# Altium PCB driver_control_2.PcbDoc
Units mm, origin at the board's own origin, x right, y up, seen from the top; angles counter-clockwise.
Board outline 75 x 80 mm, 2 copper layers (Top Layer, Bottom Layer); 60 components, 54 nets, 277 pads, 70 vias.
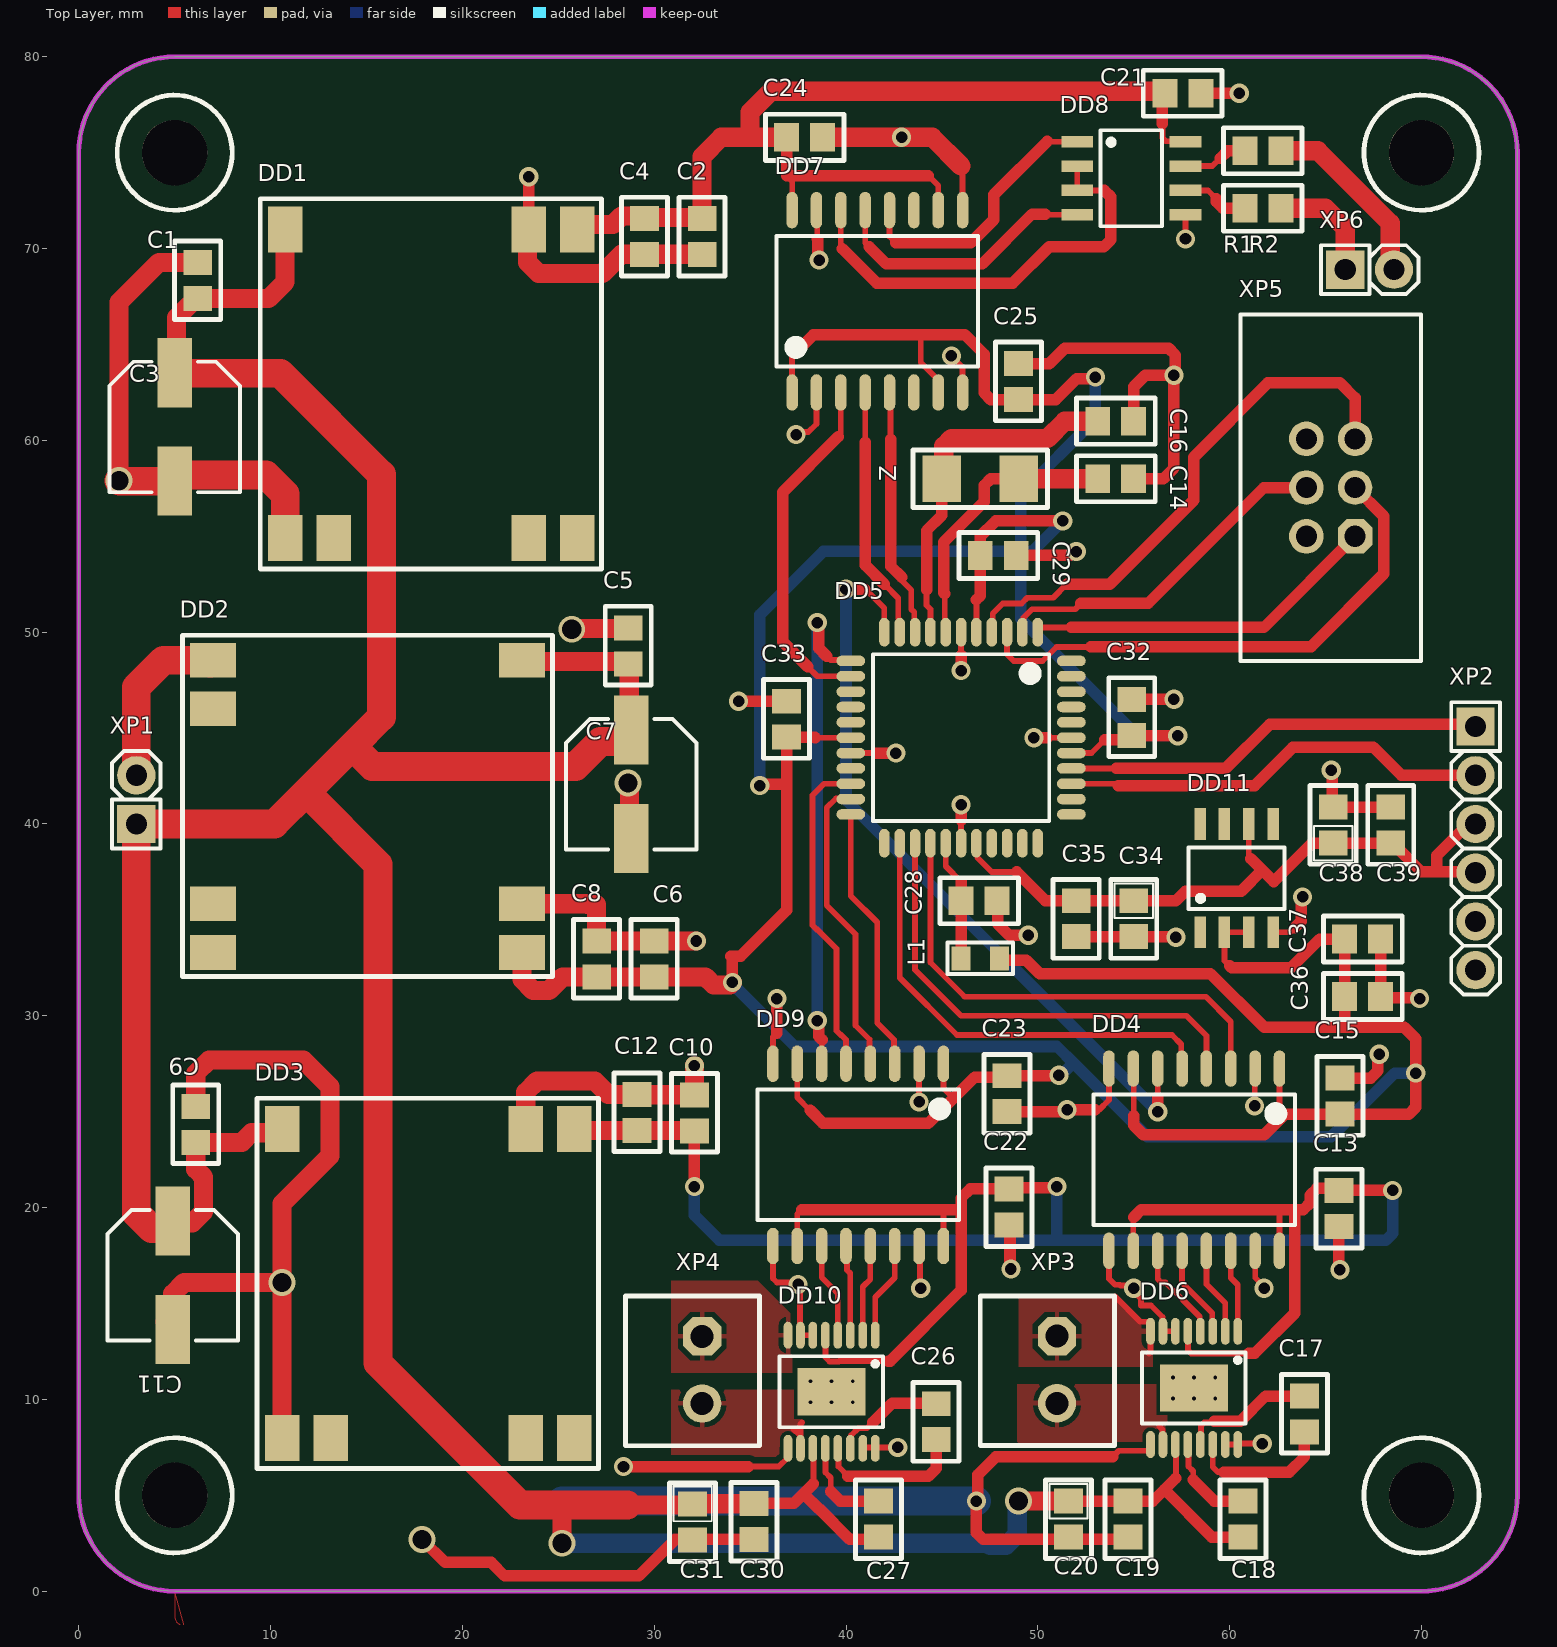
[diagram p0: Top Layer view]
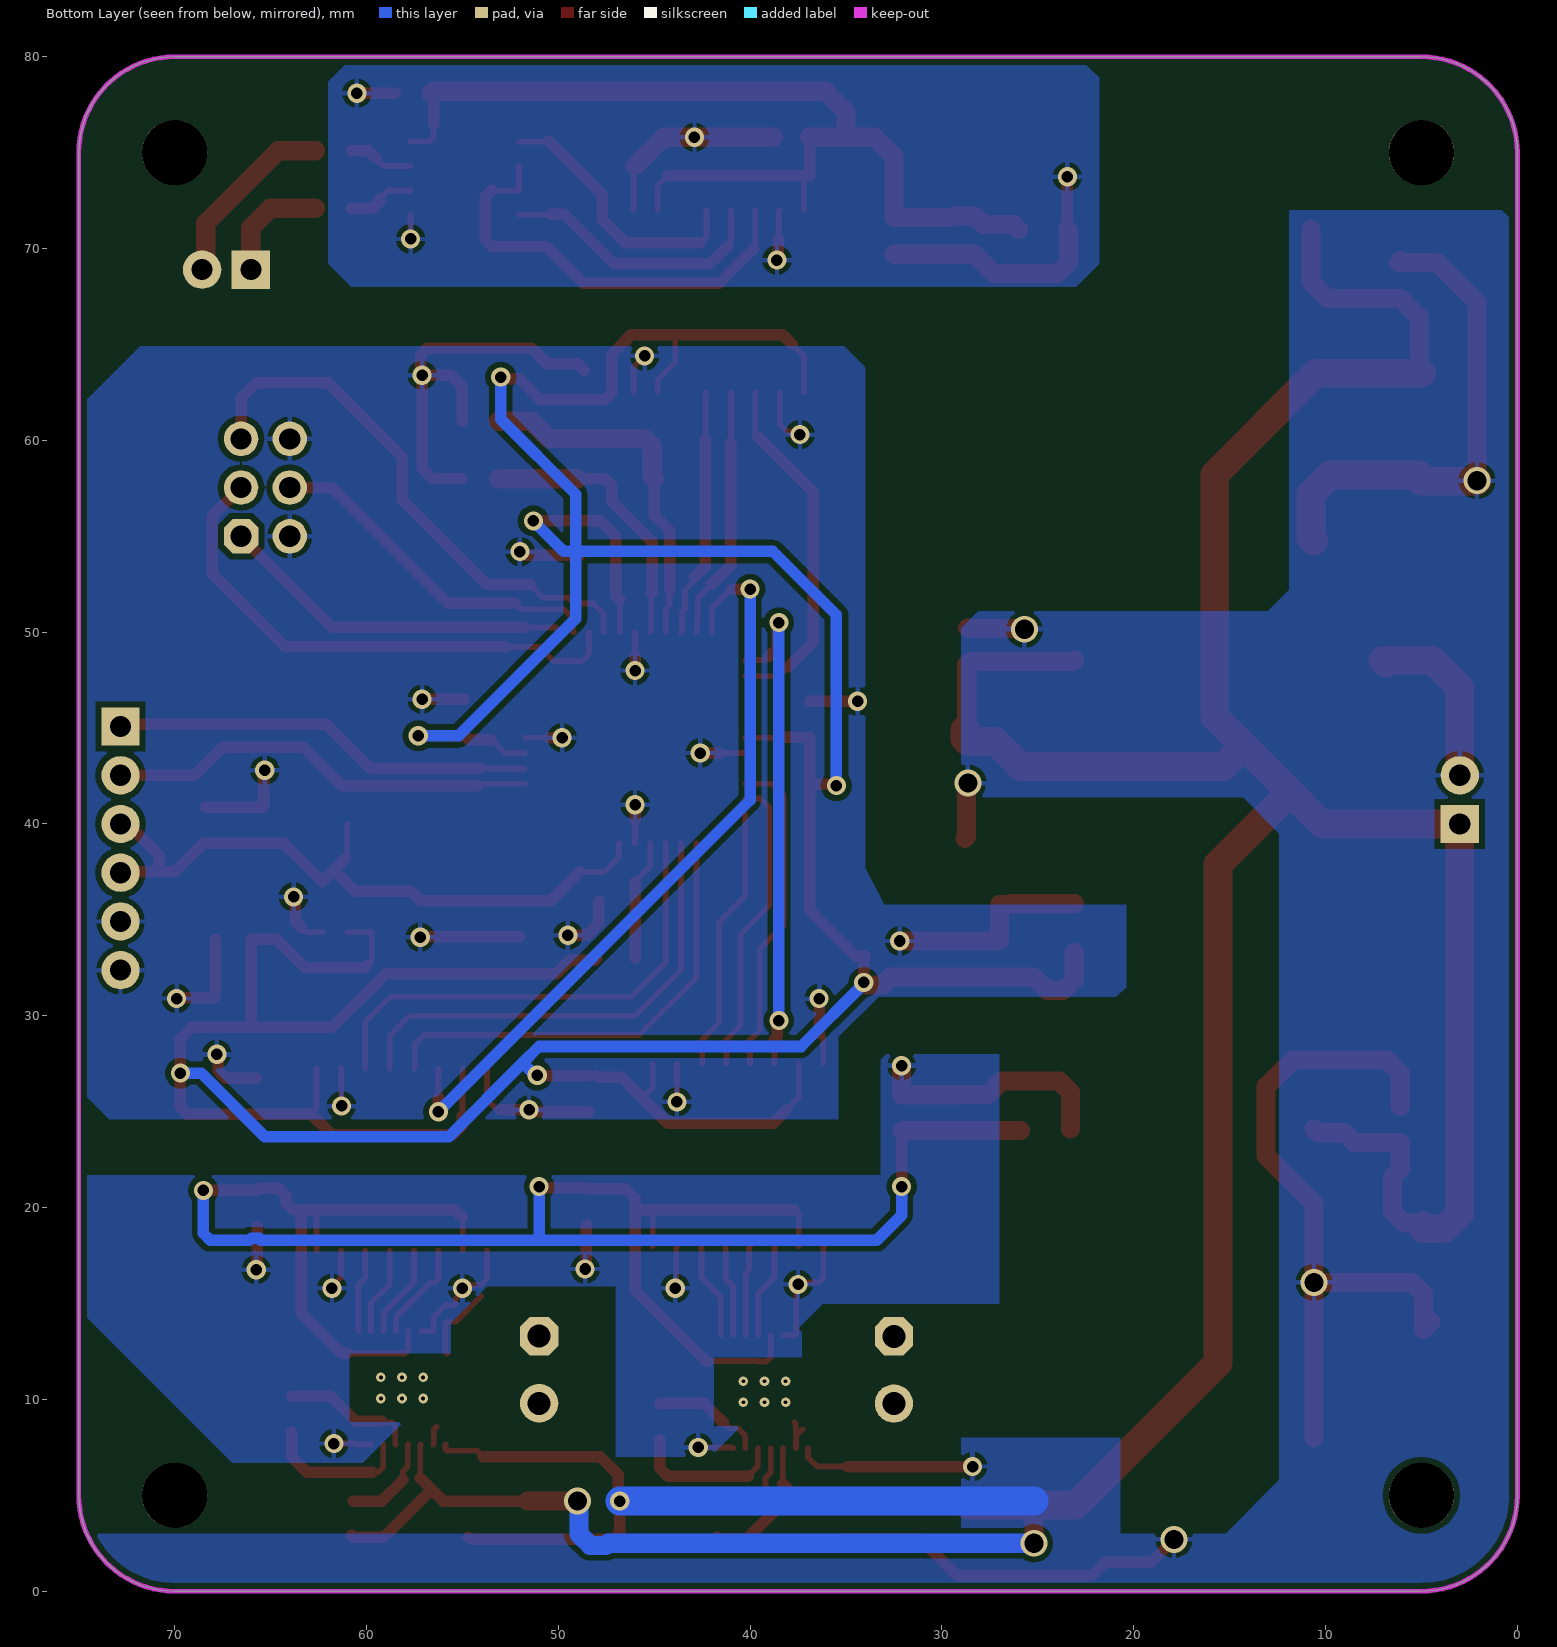
[diagram p1: Bottom Layer view, seen from below]

## Layer stack, top to bottom
Top Solder: solder mask 0.0102, Solder Resist, Dk 3.5
Top Layer: signal copper 0.0356
Dielectric 1: dielectric 0.32, FR-4, Dk 4.8
Bottom Layer: signal copper 0.0356
Bottom Solder: solder mask 0.0102, Solder Resist, Dk 3.5

## Board outline
0,5 ccw(c5,5) 5,0 70,0 ccw(c70,5) 75,5 75,9 75,75 ccw(c70,75) 70,80 5,80 ccw(c5,75) 0,75

## Design rules (kind name [scope] priority, off if disabled: settings)
Clearance Clearance_2 [All] p1: gap=0.3 ignorepadtopadclearanceinfootprint=FALSE except(0.2: Arc-SMDPad Arc-THPad Track-SMDPad Track-THPad SMDPad-SMDPad SMDPad-THPad SMDPad-Via SMDPad-Fill SMDPad-Poly SMDPad-Region SMDPad-Text SMDPad-Hole)
HoleSize [All] p1: absolutevalues=TRUE maxlimit=5 minlimit=0.5 maxpercent=80.000 minpercent=20.000
HoleToHoleClearance [All] p1: gap=0.3 allowstackedmicrovias=TRUE
PolygonConnect [All] p1: connectstyle=Relief reliefconductorwidth=0.254 reliefentries=4 polygonreliefangle="90 Angle" airgapwidth=0.254
RoutingVias [All] p1: holewidth=0.6 width=1 viastyle="Through Hole" minholewidth=0.6 minwidth=1 maxholewidth=0.6 maxwidth=1
SilkToSilkClearance [All] p1: silktosilkclearance=0.2
SilkToSolderMaskClearance [IsPad] p1: minsilkscreentomaskgap=0.2 clearancetoexposedcopper=TRUE
SolderMaskExpansion [All] p1: expansion=0.102 istentingtop=FALSE
Width [All] p1: maxlimit=4 minlimit=0.2 preferedwidth=0.3
26 further rules are at their usual default settings.

## Components (designator, comment, footprint, x,y, rotation, side; value= is the part's Value field where it differs from the comment)
C1 "10мкФ" Capacitor_0805 6.2,67.4 r90 top
C2 "0.1мкФ" Capacitor_0805 32.5,71.575 r270 top
C3 "100мкФ" CAPAE7666X61M 5,60.7 r270 top
C4 "10мкФ" Capacitor_0805 29.5,71.575 r270 top
C5 "10мкФ" Capacitor_0805 28.65,48.35 r90 top
C6 "0.1мкФ" Capacitor_0805 30,32.025 r90 top
C7 "100мкФ" CAPAE7666X61M 28.8,42.075 r270 top
C8 "10мкФ" Capacitor_0805 27,32.025 r90 top
C9 "10мкФ" Capacitor_0805 6.1,23.4 r90 top
C10 "0.1мкФ" Capacitor_0805 32.1,24 r90 top
C11 "100мкФ" CAPAE7666X61M 4.9,16.475 r270 top
C12 "10мкФ" Capacitor_0805 29.1,24.025 r90 top
C13 "0.1мкФ" Capacitor_0805 65.7,20.9 r270 top
C14 "8пкФ" Capacitor_0805 53.125,58 r0 top
C15 "0.1мкФ" Capacitor_0805 65.75,24.875 r90 top
C16 "8пкФ" Capacitor_0805 53.125,61 r0 top
C17 "22пкФ" Capacitor_0805 63.9,8.3 r90 top
C18 "0.1мкФ" Capacitor_0805 60.7,4.7 r270 top
C19 "0.1мкФ" Capacitor_0805 54.7,4.7 r270 top
C20 "1мкФ" Capacitor_tant_0805 51.6,4.7 r270 top
C21 "0.1мкФ" Capacitor_0805 58.5,78.1 r180 top
C22 "0.1мкФ" Capacitor_0805 48.5,20.975 r270 top
C23 "0.1мкФ" Capacitor_0805 48.4,26.875 r270 top
C24 "0.1мкФ" Capacitor_0805 36.9,75.8 r0 top
C25 "0.1мкФ" Capacitor_0805 49,62.125 r90 top
C26 "22пкФ" Capacitor_0805 44.7,9.775 r270 top
C27 "0.1мкФ" Capacitor_0805 41.7,4.7 r270 top
C28 "0.1мкФ" Capacitor_0805 46,36 r0 top
C29 "0.1мкФ" Capacitor_0805 47,54 r0 top
C30 "0.1мкФ" Capacitor_0805 35.2,4.575 r270 top
C31 "1мкФ" Capacitor_tant_0805 32,4.55 r270 top
C32 "0.1мкФ" Capacitor_0805 54.9,44.625 r90 top
C33 "0.1мкФ" Capacitor_0805 36.9,44.525 r90 top
C34 "1мкФ" Capacitor_tant_0805 55,36 r270 top
C35 "0.1мкФ" Capacitor_0805 52,36 r270 top
C36 "10мкФ" Capacitor_0805 66,31 r0 top
C37 "0.1мкФ" Capacitor_0805 66,34 r0 top
C38 "1мкФ" Capacitor_tant_0805 65.4,39 r90 top
C39 "0.1мкФ" Capacitor_0805 68.4,39 r90 top
DD1 "TMR-1-2411SM" TMR1SM_SMD 10.76,54.9 r270 top
DD2 "TDR-2-2411SM" TMR1SM_SMD 7,48.54 r180 top
DD3 "TMR-1-2411SM" TMR1SM_SMD 10.6,8 r270 top
DD4 "ADuM1401" ADUM_SOIC 62.6,27.25 r270 top
DD5 "ATMEGA16-8UA" ATMEGA16-44A 50,50 r270 top
DD6 "DRV8874" DRV8874_TSOP127P600-8N 60.425,13.55 r270 top
DD7 "ADuM1301" ADUM_SOIC 37.19,62.5 r90 top
DD8 "ADM485" "SOIC_N8 (REF198, ADM485)" 52.05,75.57 r0 top
DD9 "ADuM1401" ADUM_SOIC 45.08,27.5 r270 top
DD10 "DRV8874" DRV8874_TSOP127P600-8N 41.525,13.35 r270 top
DD11 "REF198" "SOIC_N8 (REF198, ADM485)" 58.46,34.35 r90 top
L1 "Fixed inductor, 10мкГн, ±20%, 0805, 100mA, -55...+125°C" "IND: 0805" 47,33 r180 top value=10мкГн
R1 "120 Ом" resistor_0805 62.675,72.1 r180 top
R2 "120 Ом" resistor_0805 62.675,75.1 r180 top
XP1 "PLS-2" "CON: PLS-2" 3,41.27 r90 top
XP2 "Connector, 6pin, 2.54mm, 500VAC, 3A" "CON: PLS-6" 72.821,38.73 r270 top
XP3 "15EDGVC-3.5-02" 15EDGVC-3.5-02 51,13.3 r270 top
XP4 "15EDGVC-3.5-02" 15EDGVC-3.5-02 32.5,13.287 r270 top
XP5 "Connector, 6pin, 2.54mm, 500VAC, 3A" "CON: IDC-6MS" 65.27,57.54 r90 top
XP6 "PLS-2" "CON: PLS-2" 67.3,68.9 r0 top
Z "11.0592Мгц" Z_0503 45,58 r0 top

## Footprints (in the part's own frame and the unit in brackets; to place one, negate y for a bottom-side part, rotate by r counter-clockwise, add the part's x,y. Pads: shape width x height; smd on the part's side, far side on the other; paste and mask are expansions set on the pad)
15EDGVC-3.5-02 [mm]
  oct 2x2 hole 1.2: 1(0,0)
  round 2 hole 1.2: 2(3.5,0)
  round 0.5 on Top Overlay: 11(-2.8,2.5)
  silkscreen extent -2.1,-4 5.7,3
ADUM_SOIC [mm]
  oval 1.9x0.6 smd: 1(0,0) 2(0,-1.27) 3(0,-2.54) 4(0,-3.81) 5(0,-5.08) 6(0,-6.35) 7(0,-7.62) 8(0,-8.89) 9(9.5,-8.89) 10(9.5,-7.62) 11(9.5,-6.35) 12(9.5,-5.08) 13(9.5,-3.81) 14(9.5,-2.54) 15(9.5,-1.27) 16(9.5,0)
  silkscreen extent 1.35,-9.69 8.15,0.8
ATMEGA16-44A [mm]
  oval 1.5x0.55 smd: 1(0,0) 2(0,-0.8) 3(0,-1.6) 4(0,-2.4) 5(0,-3.2) 6(0,-4) 7(0,-4.8) 8(0,-5.6) 9(0,-6.4) 10(0,-7.2) 11(0,-8) 23(11,-8) 24(11,-7.2) 25(11,-6.4) 26(11,-5.6) 27(11,-4.8) 28(11,-4) 29(11,-3.2) 30(11,-2.4) 31(11,-1.6) 32(11,-0.8) 33(11,0)
  oval 0.55x1.5 smd: 12(1.5,-9.75) 13(2.3,-9.75) 14(3.1,-9.75) 15(3.9,-9.75) 16(4.7,-9.75) 17(5.5,-9.75) 18(6.3,-9.75) 19(7.1,-9.75) 20(7.9,-9.75) 21(8.7,-9.75) 22(9.5,-9.75) 34(9.5,1.75) 35(8.7,1.75) 36(7.9,1.75) 37(7.1,1.75) 38(6.3,1.75) 39(5.5,1.75) 40(4.7,1.75) 41(3.9,1.75) 42(3.1,1.75) 43(2.3,1.75) 44(1.5,1.75)
  silkscreen extent 1.15,-8.6 9.85,0.6, body extent 1.15,-8.6 9.85,0.6, height 1.2
Capacitor_0805 [mm]
  rect 1.3x1.5 smd: 1(0,0) 2(1.875,0)
  silkscreen extent -1.1,-1.2 3,1.2
Capacitor_tant_0805 [mm]
  rect 1.3x1.5 smd: 1(0,0) 2(1.875,0)
  silkscreen extent -1.1,-1.2 3,1.2
CAPAE7666X61M [mm] "Aluminum Electrolytic Capacitor, Body 6,60x6,60x6,10mm, IPC Low Density"
  rect 3.6x1.8 smd: 1(-2.825,0) 2(2.825,0)
  silkscreen extent -3.4,-3.4 3.4,3.4, body extent -3.4,-3.4 3.4,3.4, height 6.1
"CON: IDC-6MS" [mm] "IDC-6MS 6 pin PCB-mount connector"
  oct 1.8x1.8 hole 1.1: 1(-2.54,-1.27)
  round 1.8 hole 1.1: 2(-2.54,1.27) 3(0,-1.27) 4(0,1.27) 5(2.54,-1.27) 6(2.54,1.27)
  round 0.5 on Top Overlay: ""(-9.6,-4.5)
  round 0.5 on Mech1: ""(-8.4,-4)
  silkscreen extent -9.05,-4.7 9.03,4.7, body extent -8.89,-4.55 8.87,4.55, height 9
"CON: PLS-2" [mm]
  rect 2x2 hole 1.1: 1(-1.27,0)
  round 2 hole 1.1: 2(1.27,0)
  silkscreen extent -2.54,-1.27 2.54,1.27, body extent -2.57,-1.28 2.51,1.26, height 8.54
"CON: PLS-6" [mm]
  rect 2x2 hole 1.1: 1(-6.35,0)
  round 2 hole 1.1: 2(-3.81,0) 3(-1.27,0) 4(1.27,0) 5(3.81,0) 6(6.35,0)
  silkscreen extent -7.62,-1.27 7.62,1.27, body extent -7.62,-1.27 7.62,1.27, height 8.54
DRV8874_TSOP127P600-8N [mm]
  oval 1.4x0.45 smd: 1(0,0) 2(0,-0.65) 3(0,-1.3) 4(0,-1.95) 5(0,-2.6) 6(0,-3.25) 7(0,-3.9) 8(0,-4.55) 9(5.9,-4.55) 10(5.9,-3.9) 11(5.9,-3.25) 12(5.9,-2.6) 13(5.9,-1.95) 14(5.9,-1.3) 15(5.9,-0.65) 16(5.9,0)
  rect 2.46x3.55 smd: 17(2.95,-2.275)
  silkscreen extent 1.1,-5 4.8,0.4
"IND: 0805" [mm]
  rect 1x1.25 smd: 1(-1,0) 2(1,0)
  silkscreen extent -1.7,-0.82 1.7,0.82, body extent -1,-0.62 1,0.63, height 0.85
resistor_0805 [mm] "ЧИП-резистор типоразмера 0805"
  rect 1.3x1.5 smd: 0(0,0) 1(1.875,0)
  silkscreen extent -1.1,-1.2 3,1.2
"SOIC_N8 (REF198, ADM485)" [mm] "SOIC, 8-Leads, Body 4,90x3,90mm, Pitch 1,27mm, IPC Medium Density"
  rect 1.65x0.6 smd: 1(0,0) 2(0,-1.27) 3(0,-2.54) 4(0,-3.81) 5(5.65,-3.81) 6(5.65,-2.54) 7(5.65,-1.27) 8(5.65,0)
  silkscreen extent 1.22,-4.41 4.43,0.6
TMR1SM_SMD [mm]
  rect 2.4x1.8 smd: 1(0,0) 2(0,2.54) 6(0,12.7) 7(0,15.24) 8(-16.1,15.24) 9(-16.1,12.7) 14(-16.1,0)
  silkscreen extent -17.7,-1.3 1.6,16.5
Z_0503 [mm]
  rect 2x2.4 smd: 1(0,0) 2(4,0)
  silkscreen extent -1.5,-1.5 5.5,1.5

## Part data
C1 C2 C4 C5 C6 C8 C9 C10 C12 C13 C14 C15 C16 C17 C18 C19 C21 C22 C23 C24 C25 C26 C27 C28 C29 C30 C32 C33 C35 C36 C37 C39: library part Capacity_0805
C3 C7 C11: library part alum_6,60x6,60
C20 C31 C34 C38: library part Capacity_tantal_0805, "tanral capacitor"
DD5: library part ATMEGA16-44A
L1: library part Inductor_0805, Manufacturer="Murata Electronics", MaxCurrent=100mA, Package=0805, PartNumber=LQM21FN100M70L, Temperature=-55...+125°C, Tolerance=±20%, TypeInductor="Fixed inductor", HelpURL=https://www.digikey.com/product-detail/en/murata-electronics-north-america/LQM21FN100M70L/490-4029-1-ND/1016289, ValueManufacturerPartNumber="Fixed inductor, 10мкГн, ±20%, 0805, 100mA, -55...+125°C"
R1 R2: library part Resistor_0805
XP1 XP6: "https://www.chipdip.ru/product/wf-2r"
XP2: library part PLS-6, CurrentMax=3A, Manufacturer=Connfly, VoltageMax=500VAC, CommentText=PLS-6, HelpURL=https://www.chipdip.ru/product/pls-6, Multichannel=6pin, PartNumber=PLS-6, Pitch=2.54mm, TypeConnector=Connector, ValueManufacturerPartNumber="Connector, 6pin, 2.54mm, 500VAC, 3A"
XP3 XP4: library part gdk
XP5: library part IDC-6, CurrentMax=3A, Manufacturer=Connfly, PartNumber=PLS-6, VoltageMax=500VAC, CommentText=IDC-6, HelpURL=https://www.chipdip.ru/product/pls-6, Multichannel=6pin, Pitch=2.54mm, TypeConnector=Connector, ValueManufacturerPartNumber="Connector, 6pin, 2.54mm, 500VAC, 3A"
Z: library part resonstor

## Free pads (board coordinates)
  round 3.4 hole 3.4 unplated: 9(5,5) 9(5,75) 9(70,5) 9(70,75)

## Via types
v1: diameter 1, hole 0.6, Top Layer to Bottom Layer, 51 vias
v2: diameter 0.5, hole 0.2, Top Layer to Bottom Layer, 12 vias
v3: diameter 1.4, hole 1, Top Layer to Bottom Layer, 7 vias

## Nets (pads, with @x,y where several pads share a name; then routed paths per layer and width w, separated by ;. In a path a pad name is that pad's centre, name@x,y a point inside that pad or via, vN(x,y) a via of type N, cw(c..) or ccw(c..) an arc to the next point about the centre after c; other vN are vias at no path point)
+5B: C6.1 C8.1 C15.1 C23.1 C25.1 C29.1 C32.1 C33.1 C36.1 C37.1 DD2.8 DD4.1 DD4.7 DD5.5 DD5.17 DD5.38 DD7.1 DD7.7 DD9.1 DD9.7 DD11.2 DD11.3 L1.1 | length 246.6
  Top Layer w0.3: DD7.1 37.19,64.39 37.8,65 ; DD9.7 37.46,25.74 38.13,25.07 ; 38.4,44.5 DD5.17 ; 44,65.5 43.9,65.4 43.9,64.06 44.81,63.15 DD7.7 ; DD9.1 45.08,26.22 45.55,25.75 45.55,25.65 ; DD5.5 46.8,51.7 ; DD5.38 52.8,43.7 53.5,44.4 ; DD4.7 55,27.23 55,24.8 ; 60,32.6 59.73,32.87 DD11.2 DD11.3 ; DD4.1 62.6,25.15 62.875,24.875
  Top Layer w0.6: v1(34.077,31.739) 34.077,33.023 34,33.1 34.5,33.1 36.9,35.5 36.9,42.1 ; v1(35.5,42) 35.577,42.077 36.877,42.077 36.9,42.1 ; 37.8,65 38.3,65.5 44,65.5 46.2,65.5 47.2,64.5 47.2,62.476 47.551,62.125 C25.1 50.925,62.125 52.023,63.223 52.923,63.223 v1(53,63.3) ; 38.13,25.07 38.8,24.4 44.3,24.4 45.55,25.65 46.7,26.8 47.925,26.8 C23.1@48,26.875 ; 38.4,44.5 38.375,44.525 C33.1 36.9,42.1 ; 46.8,51.7 47,51.9 C29.1 47,55 47.8,55.8 v1(51.3,55.8) ; L1.1 48.1,32.9 49.4,32.9 50.1,32.2 59,32.2 61.8,29.4 66,29.4 ; C23.1 48.413,26.888 51.088,26.888 v1(51.1,26.9) ; 53.5,44.4 54.675,44.4 C32.1 54.913,44.612 57.288,44.612 v1(57.3,44.6) ; 55,24.8 54.999,24.799 54.999,24.301 55.5,23.8 61.8,23.8 62.875,24.875 C15.1 69.349,24.875 69.7,25.226 69.7,28.8 69.1,29.4 66,29.4 ; 60,32.6 60.1,32.5 63.2,32.5 64.7,34 C37.1 C36.1 66,29.4
  Top Layer w1: DD2.8 23.1,31.9 23.686,31.314 24.514,31.314 25.225,32.025 C8.1 C6.1 32.675,32.025 33.1,31.6 33.938,31.6 v1(34.077,31.739)
  Bottom Layer w0.6: v1(34.077,31.739) 34.077,31.668 37.344,28.4 51,28.4 51.9,27.5 ; v1(35.5,42) 35.5,50.9 38.811,54.211 49.1,54.211 ; v1(51.1,26.9) 51.208,26.9 51.808,27.5 51.9,27.5 ; v1(51.3,55.8) 49.711,54.211 49.1,54.211 ; v1(53,63.3) 53,61.1 49.1,57.2 49.1,54.211 ; v1(57.3,44.6) 55.2,44.6 49.1,50.7 49.1,54.211 ; v1(69.7,27.013) 68.613,27.013 65.3,23.7 55.7,23.7 51.9,27.5
+5B_DRV: C10.1 C12.1 C13.1 C22.1 DD3.8 DD4.10 DD4.16 DD6.5 DD9.10 DD9.16 DD10.5 | length 116.3
  Top Layer w0.3: DD9.10 37.46,19.66 37.7,19.9 ; DD10.5 38.925,12.2 39.145,11.98 39.617,11.98 39.637,12 42.2,12 ; DD9.16 45.08,19.9 ; DD4.10 54.98,19.48 55,19.5 ; DD6.5 57.825,12.576 58.001,12.4 61,12.4 ; 62.5,19.9 62.6,19.8 DD4.16
  Top Layer w0.6: DD3.8 DD3.8@25.915,24.025 ; C12.1 C12.1@29.112,24.012 ; C10.1@32.087,24.012 C10.1 v1(32.1,21.1) ; 37.7,19.9 45.08,19.9 46,19.9 ; 42.2,12 42.3,12 46,15.7 46,19.9 ; v1(51,21.1) 50.938,21.038 48.563,21.038 C22.1 46.475,20.975 46,20.5 46,19.9 ; 55,19.5 55.4,19.9 62.5,19.9 63.4,19.9 ; 61,12.4 61.3,12.4 63.4,14.5 63.4,19.9 ; v1(68.5,20.9) C13.1 65.6,21 64.551,21 64.2,20.649 64.2,20.251 63.849,19.9 63.4,19.9
  Top Layer w1: DD3.8@25.915,24.025 C12.1 ; C12.1@29.112,24.012 C10.1@32.087,24.012
  Bottom Layer w0.6: v1(32.1,21.1) 32.1,19.6 33.4,18.3 51,18.3 ; v1(51,21.1) 51,18.3 ; v1(68.5,20.9) 68.5,18.651 68.149,18.3 66.1,18.3 66,18.4 65.6,18.4 65.5,18.3 51,18.3
+5B_RS: C2.1 C4.1 C21.2 C24.1 DD1.8 DD7.10 DD7.16 DD8.8 | length 55.2
  Top Layer w0.3: 36.9,73.8 37.2,73.5 37.2,72.01 DD7.16 ; 44.3,73.8 44.81,73.29 DD7.10 ; 56.5,76.5 56.5,75.776 56.676,75.6 57.67,75.6 DD8.8
  Top Layer w0.6: C24.1 36.9,73.8 44.3,73.8 ; 56.5,76.5 56.5,77.975 C21.2
  Top Layer w1: DD1.8 26.25,71.25 27.85,71.25 28.3,71.7 29.425,71.7 29.5,71.625 32.5,71.625 32.5,74.8 33.5,75.8 35,75.8 ; C24.1 35,75.8 ; C21.2 56.525,78.2 36.086,78.2 35,77.114 35,75.8
+27B: C1.1 C3.1 C5.1 C7.1 C9.1 C11.1 C18.2 C19.1 C20.1 C27.2 C30.1 C31.1 DD1.14 DD2.14 DD3.14 DD6.11 DD10.11 XP1.1 | length 218.8
  Top Layer w0.3: DD10.11 38.3,7.425 38.3,5.6 ; DD6.11 57.2,7.625 57.2,5.9
  Top Layer w0.6: C30.1 37.275,4.575 37.788,5.088 ; 38.3,5.6 37.788,5.088 ; C27.2 41.575,2.7 40.2,2.7 38.6,4.3 38.575,4.3 37.788,5.088 ; C20.1 C19.1 56,4.7 56.6,5.3 ; 57.2,5.9 56.6,5.3 ; C18.2@60.8,2.925 C18.2 59.075,2.825 56.6,5.3
  Top Layer w1: C11.1 5,19.2 5.914,19.2 6.5,19.786 6.5,21.6 6.1,22 C9.1 8.5,23.4 9,23.9 10.4,23.9 DD3.14 ; C3.1@5,63.5 5.1,63.6 5.1,66.4 6.1,67.4 C1.1 9.9,67.4 10.76,68.26 DD1.14 ; DD2.14 23.17,48.47 28.53,48.47 28.7,48.3 28.7,45 C7.1 ; v3(25.2,2.5) 25.2,4.5 ; 28.6,4.5 31.95,4.5 C31.1 32.013,4.562 35.187,4.562 C30.1 ; v3(49,4.7) C20.1
  Top Layer w1.5: C11.1@4.9,18.9 3.8,18.9 3,19.7 XP1.1 10.2,40 11.9,41.7 ; C3.1@5,63.5 10.5,63.5 15.779,58.221 15.779,45.579 14.25,44.05 ; 28.6,4.5 25.2,4.5 23,4.5 15.6,11.9 15.6,37.9 11.9,41.6 11.9,41.7 ; C7.1 28.8,44.45 28.65,44.3 27.2,44.3 25.9,43 15.3,43 14.25,44.05 ; 11.9,41.7 14.25,44.05
  Bottom Layer w1: v3(25.2,2.5) 47.4,2.5 47.509,2.391 48.338,2.391 48.923,2.977 48.923,4.623 v3(49,4.7)
AREF: C34.1 C35.1 C38.1 C39.1 DD5.29 DD11.6 XP2.3 XP2.4 | length 36.3
  Top Layer w0.3: DD5.29 46.848,38.952 46.848,38.252 47.6,37.5 48.9,37.5 ; DD11.6 61,38.3 61.1,38.2
  Top Layer w0.6: 48.9,37.5 50.4,36 C35.1 C34.1 57.2,36 57.7,36.5 60.6,36.5 61.7,37.6 ; 61.1,38.2 61.7,37.6 ; XP2.4 72.761,37.52 70.8,37.52 ; XP2.3 72.442,40 70.8,38.358 70.8,37.52 ; 61.7,37.6 62.3,37 64.3,39 C38.1 C39.1 68.5,39 69.98,37.52 70.8,37.52
DRV11: DD5.22 DD9.3 | length 13.9
  Top Layer w0.3: DD5.22 40.25,36.25 41.625,34.875 41.625,29.625 42.498,28.752 42.498,27.542 DD9.3
DRV12: DD5.21 DD9.4 | length 15.8
  Top Layer w0.3: DD5.21 40.218,41.332 39.473,41.332 39,40.859 39,35.75 40.5,34.25 40.5,29.5 41.228,28.772 41.228,27.542 DD9.4
DRV13: DD5.20 DD9.5 | length 17
  Top Layer w0.3: DD9.5 40,28.75 39.75,29 39.723,29 39.5,29.223 39.5,33.5 38.5,34.5 38.473,34.5 38.25,34.723 38.25,41.5 38.85,42.1 DD5.20
DRV14: DD5.12 DD9.6 | length 26.4
  Top Layer w0.3: DD9.6 38.73,28.73 38.75,28.75 ; 39,48.75 39.202,48.548 40.202,48.548 DD5.12
  Top Layer w0.6: v1(38.5,29.75) 38.577,29.673 38.577,28.923 38.75,28.75 ; v1(38.5,50.5) 38.577,50.423 38.577,49.173 39,48.75
  Bottom Layer w0.6: v1(38.5,29.75) v1(38.5,50.5)
DRV21: DD4.3 DD5.26 | length 25.6
  Top Layer w0.3: DD5.26 44.4,32.781 46.181,31 58.75,31 60.06,29.69 DD4.3
DRV22: DD4.4 DD5.25 | length 24.9
  Top Layer w0.3: DD5.25 43.6,32.4 46,30 57.75,30 58.79,28.96 DD4.4
DRV23: DD4.5 DD5.24 | length 24.4
  Top Layer w0.3: DD5.24 42.8,31.987 45.787,29 57,29 57.478,28.522 57.478,27.292 DD4.5
DRV24: DD4.6 DD5.11 | length 39.9
  Top Layer w0.3: 40.989,52.239 41.011,52.239 42,51.25 DD5.11 ; 56.25,25.75 DD4.6
  Top Layer w0.6: v1(40,52.25) 40.011,52.239 40.989,52.239 ; v1(56.25,25) 56.25,25.75
  Bottom Layer w0.6: v1(40,52.25) 40,41.25 v1(56.25,25)
ENB: DD5.13 DD7.3 | length 18.6
  Top Layer w0.3: 38,48.2 38.5,47.7 DD5.13 ; 39.6,60.2 39.73,60.33 DD7.3
  Top Layer w0.6: 38,48.2 36.7,49.5 36.7,57.3 39.6,60.2
GND: C1.2 C3.2 C5.2 C7.2 C9.2 C11.2 C19.2 C20.2 C30.2 C31.2 DD1.1 DD2.1 DD3.1 DD6.9 DD10.9 XP1.2 | length 149.7
  Top Layer w0.3: 34.9,6.5 36.495,6.5 36.975,6.98 DD10.9 ; 53.9,7 54.225,7.325 55.806,7.325 55.875,7.394 DD6.9
  Top Layer w0.6: v3(17.9,2.7) 19.1,1.5 21.5,1.5 22.2,0.8 29.2,0.8 31.1,2.7 C30.2 ; v1(28.4,6.5) 34.9,6.5 ; 53.9,7 47.8,7 46.877,6.077 46.877,4.777 v1(46.8,4.7) 46.8,3.051 47.151,2.7 54.575,2.7 C19.2
  Top Layer w1: v3(2.1,57.9) 2.1,67.2 4.175,69.275 C1.2 C1.2@6.125,69.35 ; C11.2@4.5,14.05 C11.2 4.9,15.514 5.486,16.1 6.1,16.1 v3(10.6,16.1) ; C3.2@4.975,57.9 C3.2 ; C9.2 6.1,27 6.8,27.7 11.7,27.7 13.1,26.3 13.1,22.7 10.6,20.2 v3(10.6,16.1) ; DD3.1 v3(10.6,16.1) ; v3@25.7,50.075 v3(25.7,50.15) 25.737,50.187 28.613,50.187 C5.2 ; v3(28.638,42.138) 28.714,42.061 28.714,39.336 C7.2
  Top Layer w1.5: v3(2.1,57.9) 2.125,57.875 C3.2 ; XP1.2 3,47.125 4.415,48.54 DD2.1 DD2.1@6.85,48.39 ; C3.2@4.975,57.9 4.975,58.025 5.15,58.2 9.76,58.2 10.76,57.2 DD1.1 DD1.1@10.61,54.75
  Bottom Layer w1: v3@28.575,42.2 v3(28.638,42.138)
  Bottom Layer w1.5: 25.2,4.7 v1(46.8,4.7)
MISO: DD5.2 XP5.4 | length 18.3
  Top Layer w0.3: DD5.2 49.248,50.048 49.248,50.748 49.7,51.2 51.95,51.2 52.25,51.5
  Top Layer w0.6: 52.25,51.5 55.75,51.5 61.79,57.54 XP5.4
MOSI: DD5.1 XP5.1 | length 18.7
  Top Layer w0.3: DD5.1 50,50.135 50.115,50.25 51.75,50.25
  Top Layer w0.6: 51.75,50.25 61.79,50.25 XP5.1
NetC17_1: C17.1 DD6.14 | length 7.7
  Top Layer w0.3: DD6.14 59.125,6.475 59.4,6.2 59.7,6.2
  Top Layer w0.6: 59.7,6.2 63.1,6.2 63.9,7 C17.1
NetC17_2: C17.2 DD6.13 | length 7
  Top Layer w0.3: DD6.13 58.504,7.679 58.504,8.628 58.676,8.8 59.15,8.8 59.2,8.85
  Top Layer w0.6: 59.2,8.85 60.55,8.85 61.875,10.175 C17.2
NetC18_1: C18.1 DD6.12 | length 5
  Top Layer w0.3: DD6.12 57.854,7.621 57.854,6.506 58.1,6.259 58.1,5.8
  Top Layer w0.6: 58.1,5.8 59.2,4.7 C18.1
NetC26_1: C26.1 DD10.14 | length 5.8
  Top Layer w0.3: DD10.14 40.254,7.479 40.254,8.117 40.637,8.5 41.1,8.5 41.4,8.8
  Top Layer w0.6: 41.4,8.8 42.4,9.8 44.675,9.8 C26.1
NetC26_2: C26.2 DD10.13 | length 7.9
  Top Layer w0.3: DD10.13 39.604,7.421 39.604,6.496 40.1,6
  Top Layer w0.6: 40.1,6 44.3,6 44.7,6.4 C26.2
NetC27_1: C27.1 DD10.12 | length 5.1
  Top Layer w0.3: DD10.12 38.925,6.19 39.2,5.915 39.2,5.2
  Top Layer w0.6: 39.2,5.2 39.7,4.7 C27.1
NetC28_1: C28.1 DD5.27 L1.2 | length 6.3
  Top Layer w0.3: DD5.27 45.2,37.8 46,37
  Top Layer w0.6: L1.2 C28.1 46,37
NetDD4_11: DD4.11 DD6.4 | length 5.3
  Top Layer w0.3: DD4.11 56.25,16.276 56.426,16.1 56.651,16.1 58.446,14.305 58.446,13.579 DD6.4
NetDD4_12: DD4.12 DD6.3 | length 4.9
  Top Layer w0.3: DD4.12 57.52,16.08 59.096,14.504 59.096,13.579 DD6.3
NetDD4_13: DD4.13 DD6.2 | length 4.6
  Top Layer w0.3: DD4.13 58.79,16.01 59.775,15.025 DD6.2
NetDD4_14: DD4.14 DD6.1 | length 4.4
  Top Layer w0.3: DD4.14 60.06,16.34 60.425,15.975 DD6.1
NetDD6_8: DD6.8 XP3.1 | length 4
  Top Layer w0.3: 54.023,15.377 55.346,14.054 55.806,14.054 55.875,13.984 DD6.8 55.875,12.475 55.8,12.4
NetDD6_10: DD6.10 XP3.2 | length 1
  Top Layer w0.3: 56.338,8.576 56.496,8.418 56.496,7.679 DD6.10
NetDD7_12: DD7.12 DD8.1 | length 14.3
  Top Layer w0.3: DD7.12 42.27,70.63 42.6,70.3 ; 50.5,75.6 50.53,75.57 DD8.1
  Top Layer w0.6: 42.6,70.3 46.5,70.3 47.7,71.5 47.7,72.8 50.5,75.6
NetDD7_13: DD7.13 DD8.4 | length 14.3
  Top Layer w0.3: DD7.13 41,70.3 41.2,70.1 ; 50.4,71.8 50.44,71.76 DD8.4
  Top Layer w0.6: 41.2,70.1 42.1,69.2 47.1,69.2 49.7,71.8 50.4,71.8
NetDD7_14: DD7.14 DD8.2 DD8.3 | length 23.1
  Top Layer w0.3: DD7.14 39.73,70.07 39.8,70 ; DD8.2 DD8.3 53.47,73.03
  Top Layer w0.6: 39.8,70 41.6,68.2 48.7,68.2 50.6,70.1 53.449,70.1 53.8,70.451 53.8,72.7 53.47,73.03
NetDD8_6: DD8.6 R1.1 | length 3.6
  Top Layer w0.3: DD8.6 58.87,73.03 59.3,72.6
  Top Layer w0.6: 59.3,72.6 59.3,72.451 59.651,72.1 R1.1
NetDD8_7: DD8.7 R2.1 | length 3.4
  Top Layer w0.3: DD8.7 59.1,74.3 59.5,74.7
  Top Layer w0.6: 59.5,74.7 59.9,75.1 R2.1
NetDD9_11: DD9.11 DD10.4 | length 5
  Top Layer w0.3: DD9.11 38.73,16.37 39.575,15.525 DD10.4
NetDD9_12: DD9.12 DD10.3 | length 4.7
  Top Layer w0.3: DD9.12 40.057,17.943 40.057,16.743 40.225,16.575 DD10.3
NetDD9_13: DD9.13 DD10.2 | length 4.8
  Top Layer w0.3: DD10.2 40.875,15.875 41.27,16.27 DD9.13
NetDD9_14: DD9.14 DD10.1 | length 5.1
  Top Layer w0.3: DD10.1 41.525,15.325 42.54,16.34 DD9.14
NetDD10_8: DD10.8 XP4.1
NetDD10_10: DD10.10 XP4.2 | length 2.5
  Top Layer w0.3: 37.264,8.449 37.596,8.117 37.596,7.479 DD10.10 37.625,8.725 37.7,8.8
NetR1_0: R1.0 XP6.1 | length 6
  Top Layer w1: R1.0 65,72.1 66.03,71.07 XP6.1
NetR2_0: R2.0 XP6.2 | length 9.8
  Top Layer w1: R2.0 64.6,75.1 68.379,71.321 68.379,69.091 XP6.2
POT1: DD5.37 XP2.1 | length 22.1
  Top Layer w0.3: DD5.37 54.1,42.9
  Top Layer w0.6: 54.1,42.9 59.8,42.9 62.1,45.2 72.701,45.2 XP2.1
POT2: DD5.36 XP2.2 | length 22.5
  Top Layer w0.3: DD5.36 54.1,42.1 54.2,42
  Top Layer w0.6: 54.2,42 61.3,42 63,43.7 63.3,44 67.5,44 68.96,42.54 XP2.2
RST: DD5.4 XP5.5 | length 29
  Top Layer w0.3: DD5.4 47.648,50.048 47.648,50.972 48.176,51.5 49.151,51.5 49.451,51.8 50.8,51.8 51.5,52.5
  Top Layer w0.6: 51.5,52.5 53.75,52.5 58.125,56.875 58.125,59.125 62,63 65.75,63 66.54,62.21 XP5.5 XP5.5@66.31,60.31
RXD: DD5.9 DD7.5 | length 12.7
  Top Layer w0.3: DD7.5 42.315,62.455 42.315,60.085 42.345,60.055 ; 43,52.6 43.4,52.2 43.4,51.2 43.552,51.048 43.552,50.048 DD5.9
  Top Layer w0.6: 42.345,60.055 42.345,53.428 42.9,52.873
SCK: DD5.3 XP5.3 | length 27.9
  Top Layer w0.3: DD5.3 48.4,48.85 48.75,48.5 50.25,48.5 50.975,49.225 52.725,49.225 52.75,49.25
  Top Layer w0.6: 52.75,49.25 64.25,49.25 68.04,53.04 68.04,56.04 XP5.3
TXD: DD5.10 DD7.4 | length 13.2
  Top Layer w0.3: 41,59.9 DD7.4 ; 42,52.5 42.725,51.775 42.725,50.727 42.752,50.7 42.752,50.048 DD5.10
  Top Layer w0.6: 41,59.9 41,53.5 42,52.5
XT1: C14.1 DD5.7 Z.2 | length 14.6
  Top Layer w0.3: 45.15,52 45.15,50.702 45.152,50.7 45.152,50.048 DD5.7
  Top Layer w0.6: 45.15,52 45.1,52.05 45.1,54.7 47.2,56.8 47.2,57.649 47.551,58 Z.2
  Top Layer w1: Z.2 C14.1
XT2: C16.1 DD5.8 Z.1 | length 18.7
  Top Layer w0.3: 44.2,52.2 44.2,51.4 44.4,51.2 DD5.8
  Top Layer w0.6: 44.2,52.2 44.2,55.3 45,56.1 Z.1
  Top Layer w1: Z.1 45.1,58.1 45.1,59.7 45.5,60.1 50.5,60.1 51.4,61 C16.1
Общ: C6.2 C8.2 C14.2 C15.2 C16.2 C23.2 C25.2 C28.2 C29.2 C32.2 C33.2 C34.2 C35.2 C36.2 C37.2 C38.2 C39.2 DD2.9 DD4.2 DD4.8 DD5.6 DD5.18 DD5.28 DD5.39 DD7.2 DD7.8 DD9.2 DD9.8 DD11.4 XP2.5 XP2.6 XP5.2 XP5.6 | length 92.8
  Top Layer w0.3: DD9.8 36.19,28.89 36.4,29.1 ; v1(37.4,60.3) 37.534,60.434 38.034,60.434 38.46,60.86 DD7.2 ; DD5.18 41.6,43.7 ; DD9.2 DD9.2 43.811,25.514 v1(43.812,25.512) ; v1(45.5,64.4) 46.08,63.82 DD7.8 ; DD5.28 46,40.2 ; 46,48.8 DD5.6 ; 50.5,44.5 DD5.39 ; 53,25.1 53.2,25.1 53.71,25.61 DD4.8 ; v1(61.3,25.3) 61.315,25.315 61.315,27.235 DD4.2 ; DD11.4 63.15,34.35 63.4,34.6
  Top Layer w0.6: v1(34.4,46.4) C33.2 ; 36.4,29.1 v1(36.4,30.9) ; 41.6,43.7 v1(42.6,43.7) ; 46,40.2 v1(46,41) ; v1(46,48) 46,48.8 ; C28.2 47.9,35.975 47.9,34.8 48.5,34.2 v1(49.5,34.2) ; C23.2 51.423,25 v1(51.523,25.1) 53,25.1 ; C25.2@48.65,63.65 C25.2 50.6,64 51.4,64.8 56.825,64.8 57.177,64.449 57.177,63.477 v1(57.1,63.4) ; C29.2 51.692,54 51.892,54.2 v1(52,54.2) ; v1(49.8,44.5) 50.5,44.5 ; C35.2 C34.2 55.012,34.112 57.188,34.112 v1(57.2,34.1) ; C32.2 v1(57.1,46.5) ; C14.2 56.549,58 57.1,58.551 v1(57.1,63.4) ; C16.2 55,62.8 55.6,63.4 v1(57.1,63.4) ; 63.4,34.6 63.723,34.923 63.723,36.123 v1(63.8,36.2) ; v1(65.3,42.8) 65.35,42.75 65.35,40.925 C38.2 C39.2 ; C15.2 67.35,26.75 67.723,27.123 67.723,27.923 v1(67.8,28) ; C37.2 C36.2 67.925,30.95 69.85,30.95 v1(69.9,30.9)
  Top Layer w1: DD2.9 26.46,35.84 26.5,35.8 27,35.8 C8.2 C6.2 v1(32.2,33.9)
Общ_DRV: C10.2 C12.2 C13.2 C22.2 DD3.9 DD4.9 DD4.15 DD6.6 DD6.7 DD6.15 DD6.16 DD9.9 DD9.15 DD10.6 DD10.7 DD10.15 DD10.16 | length 38.9
  Top Layer w0.3: DD9.9 36.19,16.31 36.4,16.1 37.4,16.1 v1(37.5,16) 37.596,15.904 37.596,13.379 DD10.7 DD10.6 ; DD10.15 40.925,7.5 v1(42.7,7.5) ; DD9.15 43.855,17.955 43.855,15.845 v1(43.9,15.8) ; DD4.9 53.71,16.29 54.023,15.977 54.271,15.977 54.315,15.934 54.866,15.934 v1(55,15.8) 55,15.611 55.374,15.237 55.374,14.9 55.9,14.9 56.496,14.304 56.496,13.579 DD6.7 DD6.6 ; DD6.15 DD6.16 60.475,7.7 v1(61.7,7.7) ; DD4.15 61.33,16.35 61.8,15.88 v1(61.8,15.8)
  Top Layer w0.6: C22.2 48.55,19.05 48.55,16.85 v1(48.6,16.8) ; C13.2 65.7,16.808 v1(65.75,16.758)
  Top Layer w1: DD3.9 23.3,26.014 23.886,26.6 26.9,26.6 27.6,25.9 C12.2 29.112,25.887 C10.2@32.087,25.887 ; C10.2 C10.2@32.087,25.887 ; v1(32.1,27.4) 32.1,26.075 32,25.975 C10.2@32.087,25.887
Общ_RS: C2.2 C4.2 C21.1 C24.2 DD1.9 DD7.9 DD7.15 DD8.5 | length 30.3
  Top Layer w0.3: DD7.15 38.5,71.96 38.5,70.5 ; 46,74.3 46.08,74.22 DD7.9 ; v1(57.7,70.5) DD8.5
  Top Layer w0.6: DD1.9 v1(23.46,73.74) ; 38.5,70.5 38.523,70.477 38.523,69.477 v1(38.6,69.4) ; C21.1 v1(60.5,78.1)
  Top Layer w1: DD1.9 23.4,70.94 23.4,69.286 23.986,68.7 27.3,68.7 28.3,69.7 C4.2 C2.2 ; C24.2 v1(42.9,75.8) 44.5,75.8 46,74.3
pads on no net: DD1.2 DD1.6 DD1.7 DD2.2 DD2.6 DD2.7 DD3.2 DD3.6 DD3.7 DD5.14 DD5.15 DD5.16 DD5.19 DD5.23 DD5.30 DD5.31 DD5.32 DD5.33 DD5.34 DD5.35 DD5.40 DD5.41 DD5.42 DD5.43 DD5.44 DD6.17 DD7.6 DD7.11 DD10.17 DD11.1 DD11.5 DD11.7 DD11.8 XP3.11 XP4.11 XP5.
copper on no net:
  other v2: 38.15,9.85 39.25,9.85 40.35,9.85 57.05,10.05 58.15,10.05 59.25,10.05 38.15,10.95 39.25,10.95 40.35,10.95 57.05,11.15 58.15,11.15 59.25,11.15

## Polygon pours and split planes (outlines as drawn)
Общ on Bottom Layer "Общ_L02_P001" (solid, pour order 1): 20.4,35.8 20.4,31.5 20.9,31 33.3,31 35.4,28.9 35.4,24.6 73.4,24.6 75,26.2 75,61.7 71.8,64.9 35.1,64.9 34,63.8 34,37.7 33,35.8
GND on Bottom Layer "GND_L02_P011" (solid, pour order 11): 0.8,72 11.9,72 11.9,52.2 13,51.1 28.1,51.1 29,50.2 29,42.2 28.2,41.4 14.3,41.4 12.4,39.5 12.4,5.8 15.2,3 74.6,3 72.444,0.844 cw(c70.648,2.64) 70.648,0.1 2.54,0.1 cw(c2.54,2.64) 0,2.64 0,71.2
GND on Bottom Layer "GND_L02_P014" (solid, pour order 14): 29,8 29,2 cw(c28.759,2.241) 28.759,1.9 20.7,1.9 20.7,8
no net on Bottom Layer "NONET_L02_P010" (solid, pour order 10): 42.3,10.4
Общ_DRV on Bottom Layer "Общ_DRV_L02_P009" (solid, pour order 9): 27,28 27,15 36.2,15 37.5,13.7 37.3,13.5 37.3,11.8 42.1,7 47,7 47,15.9 53.7,15.9 55.6,14 55.6,11.3 60.2,6.7 67,6.7 75,14.7 75,21.4 74.7,21.7 33.2,21.7 33.2,27.7 32.9,28
no net on Bottom Layer "NONET_L02_P004" (solid, pour order 4): 33.6,15.9
Общ_RS on Bottom Layer "Общ_RS_L02_P000" (solid, pour order 0): 21.8,77.1 21.8,76.8 21.8,69.2 23,68 60.8,68 62,69.2 62,78.7 60.7,80 22.9,80 21.8,78.9
NetDD6_8 on Top Layer "NETDD6_8_L01_P007" (solid, pour order 7): 49,15.4 54,15.4 55.2,14.2 56,14.2 56,11.7 49,11.7
NetDD6_10 on Top Layer "NETDD6_10_L01_P008" (solid, pour order 8): 50.031,10.8 56.737,10.8 56.737,6.988 49.737,6.988 48.937,7.788 48.937,10.8
NetDD10_10 on Top Layer "NETDD10_10_L01_P006" (solid, pour order 6): 30.9,10.5 30.9,7.1 31,7 37.8,7 37.7,7.1 37.7,10.5
NetDD10_8 on Top Layer "NETDD10_8_L01_P005" (solid, pour order 5): 30.9,11.4 30.9,16.2 35.4,16.2 37.2,14.4 37.2,11.4
no net on Top Layer "NONET_L01_P012" (solid, pour order 12): 5,0 5,-1.3 ccw(c5.5,-1.3) 5.5,-1.8

## Keep-outs
Keep-Out Layer:
  the board outline again, w0.254

## Other copper
Bottom Layer:
  pour cut-out: 55.4,12.4 55.4,8.9 55.5,8.8 60.9,8.8 60.9,12.3 60.8,12.4
  pour cut-out: 36.6,12.2 41.9,12.2 41.9,8.5 41.8,8.6 36.5,8.6

## Silkscreen, mask and mechanical layers (free items; w line width, h text height)
Top Overlay:
  circle w0.254: c70,5 r3
  circle w0.254: c5,5 r3
  circle w0.254: c70,75 r3
  circle w0.254: c5,75 r3